# EAGLE board Amplifier-ClassAB (EAGLE 7.2.0)
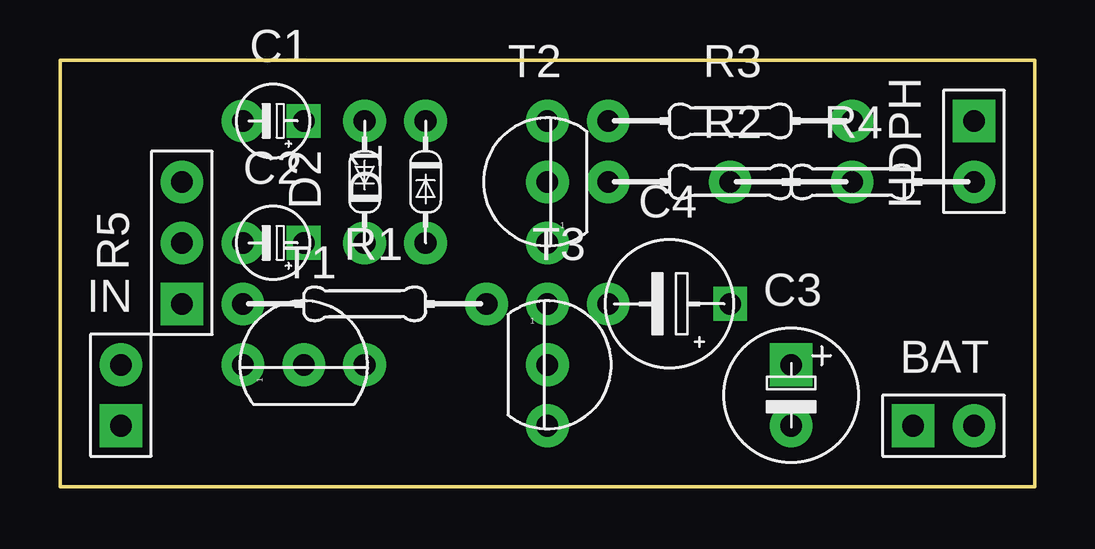
[diagram p0: board, top side]
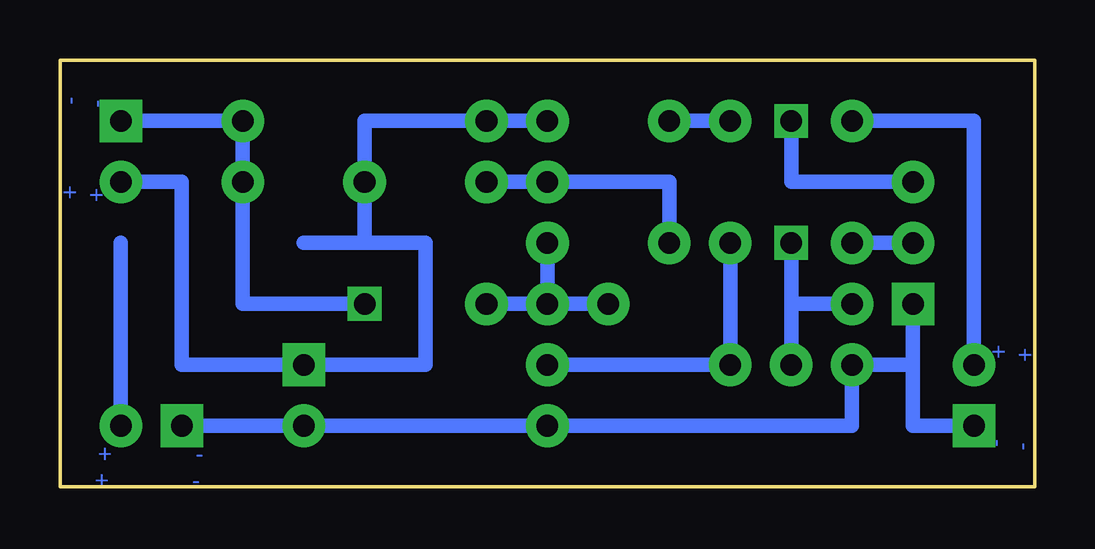
[diagram p1: board, bottom side, seen from below]

Size 40.64 x 17.78 mm. Coordinates in mm from the lower left corner, seen from the top.
Outline: 0,17.78 0,0 40.64,0 40.64,17.78 0,17.78
Outline: 0,17.78 0,17.78
Copper layers (1*16): Top 0.035mm / dielectric 1.5mm / Bottom 0.035mm
Design rules "default *": minimum track width 10mil, minimum drill 0.61mm, track to track 8mil, track to pad 8mil, pad to pad 8mil, via to via 8mil, smd to smd 8mil, copper to edge 40mil, drill to drill 8mil, minimum pad ring 0mil, minimum via ring 8mil, stop-mask expansion 4mil, vias tented up to drill 24mil, thermal gap 10mil
Net classes: 0 default: width 0.61 mm, clearance 0.33 mm

## Footprints (pad centres in the part's own frame; a part is rotated, then mirrored left to right if it is on the bottom)
SPAD+- = drill 0.9 pad 1.778 square: 1 0,-1.27 | drill 0.9 pad 1.778: 2 0,1.27
E2,5-3 = drill 0.9 pad 1.408 square: + -1.27,0 | drill 0.9 pad 1.778: - 1.27,0
E2,5-6 = drill 0.9 pad 1.778 square: + -1.27,0 | drill 0.9 pad 1.778: - 1.27,0
E5-4 = drill 0.9 pad 1.408 square: + -2.54,0 | drill 0.9 pad 1.778: - 2.54,0
DO34-5-V = drill 0.9 pad 1.778: A 0,-2.54; C 0,2.54
DO34-5V = drill 0.9 pad 1.778: A 0,2.54; C 0,-2.54
SPAD-+ = drill 0.9 pad 1.778 square: 1 0,-1.27 | drill 0.9 pad 1.778: 2 0,1.27
0204/10 = drill 0.9 pad 1.778: 1 -5.08,0; 2 5.08,0
CONN-3P = drill 0.9 pad 1.778 square: 1 0,-2.54 | drill 0.9 pad 1.778: 2 0,0; 3 0,2.54
TO92 = drill 0.9 pad 1.778: 1 0,2.54; 2 0,0; 3 0,-2.54
TO92_T2 = drill 0.9 pad 1.778: 1 0,2.54; 2 0,0; 3 0,-2.54

## Placement (x,y rotation side)
BAT  SPAD+-+-  [SPAD+-]  36.83,2.54 270 top
C1  4.7μF  [E2,5-3]  8.89,15.24 180 top
C2  4.7μF  [E2,5-3]  8.89,10.16 180 top
C3  470μF  [E2,5-6]  30.48,3.81 270 top
C4  100μF  [E5-4]  25.4,7.62 180 top
D1  1N4148  [DO34-5-V]  15.24,12.7 0 top
D2  1N4148  [DO34-5V]  12.7,12.7 0 top
HDPH  SPAD+--+  [SPAD-+]  38.1,13.97 180 top
IN  SPAD+--+  [SPAD-+]  2.54,3.81 0 top
R1  100kΩ  [0204/10]  12.7,7.62 0 top
R2  330Ω  [0204/10]  27.94,12.7 0 top
R3  100Ω  [0204/10]  27.94,15.24 0 top
R4  27Ω  [0204/10]  33.02,12.7 0 top
R5  100kΩ  [CONN-3P]  5.08,10.16 0 top
T1  2N3904  [TO92]  10.16,5.08 90 top
T2  2N3904  [TO92_T2]  20.32,12.7 180 top
T3  2N3906  [TO92_T2]  20.32,5.08 0 top

## Library data of the parts
BAT C1-C4 D1 D2 HDPH IN R1-R5 T1-T3 = common

## Nets
GND: BAT.1 C3.- IN.1 R5.1 T1.1 T3.3
N$1: D1.A R2.1 T2.2
N$2: D2.C T1.3 T3.2
N$3: D1.C D2.A
N$4: C4.- R1.2 T2.1 T3.1
N$5: C1.+ R5.3
N$6: C2.- R5.2
N$7: C2.+ R1.1 T1.2
N$8: R3.1 T2.3
N$9: C4.+ HDPH.1 R2.2 R3.2
N$10: C1.- IN.2
NET_12: C3.+
NET_13: HDPH.2 R4.1
V+: BAT.2

## Tracks (layer width: path | path; a pad name or v marks a point on that pad's centre or on a via)
GND
  Bottom 0.61: BAT.1 C3.- T3.3 7.62,2.54 T1.1 5.08,5.08 | R5.1 5.08,5.08 | 5.08,5.08 | IN.1 5.08,2.54 5.08,5.08
N$1
  Bottom 0.61: T2.2 15.24,12.7 D1.A | R2.1 T2.2 | T2.2
N$2
  Bottom 0.61: T3.2 T1.3 D2.C
N$3
  Bottom 0.61: D2.A D1.C
N$4
  Bottom 0.61: T3.1 C4.- | T2.1 T3.1 | R1.2 T3.1
N$5
  Bottom 0.61: R5.3 10.16,12.7 C1.+
N$6
  Bottom 0.61: R5.2 C2.-
N$7
  Bottom 0.61: R1.1 10.16,7.62 | 10.16,7.62 C2.+ | C2.+ | T1.2 10.16,7.62
N$8
  Bottom 0.61: R3.1 27.94,15.24 27.94,10.16 | T2.3 R3.1 | R3.1
N$9
  Bottom 0.61: C4.+ 33.02,7.62 R2.2 R3.2 HDPH.1
N$10
  Bottom 0.61: IN.2 2.54,15.24 C1.-
NET_12
  Bottom 0.61: 27.94,10.16 30.48,10.16 | 30.48,10.16 | 30.48,10.16 25.4,10.16 25.4,5.08 C3.+ 35.56,5.08 35.56,12.7 38.1,12.7
NET_13
  Bottom 0.61: HDPH.2 35.56,12.7 35.56,10.16
V+
  Bottom 0.61: 38.1,10.16 BAT.2 | BAT.2

## Text on the board
Bottom: - | + | + | - | - | +